# Altium PCB dianshe1dianluban.PcbDoc
Units mil, origin at the board's own origin, x right, y up, seen from the top; angles counter-clockwise.
Board outline 6000 x 4000 mil, 2 copper layers (Top Layer, Bottom Layer); 23 components, 15 nets, 71 pads, 0 vias.
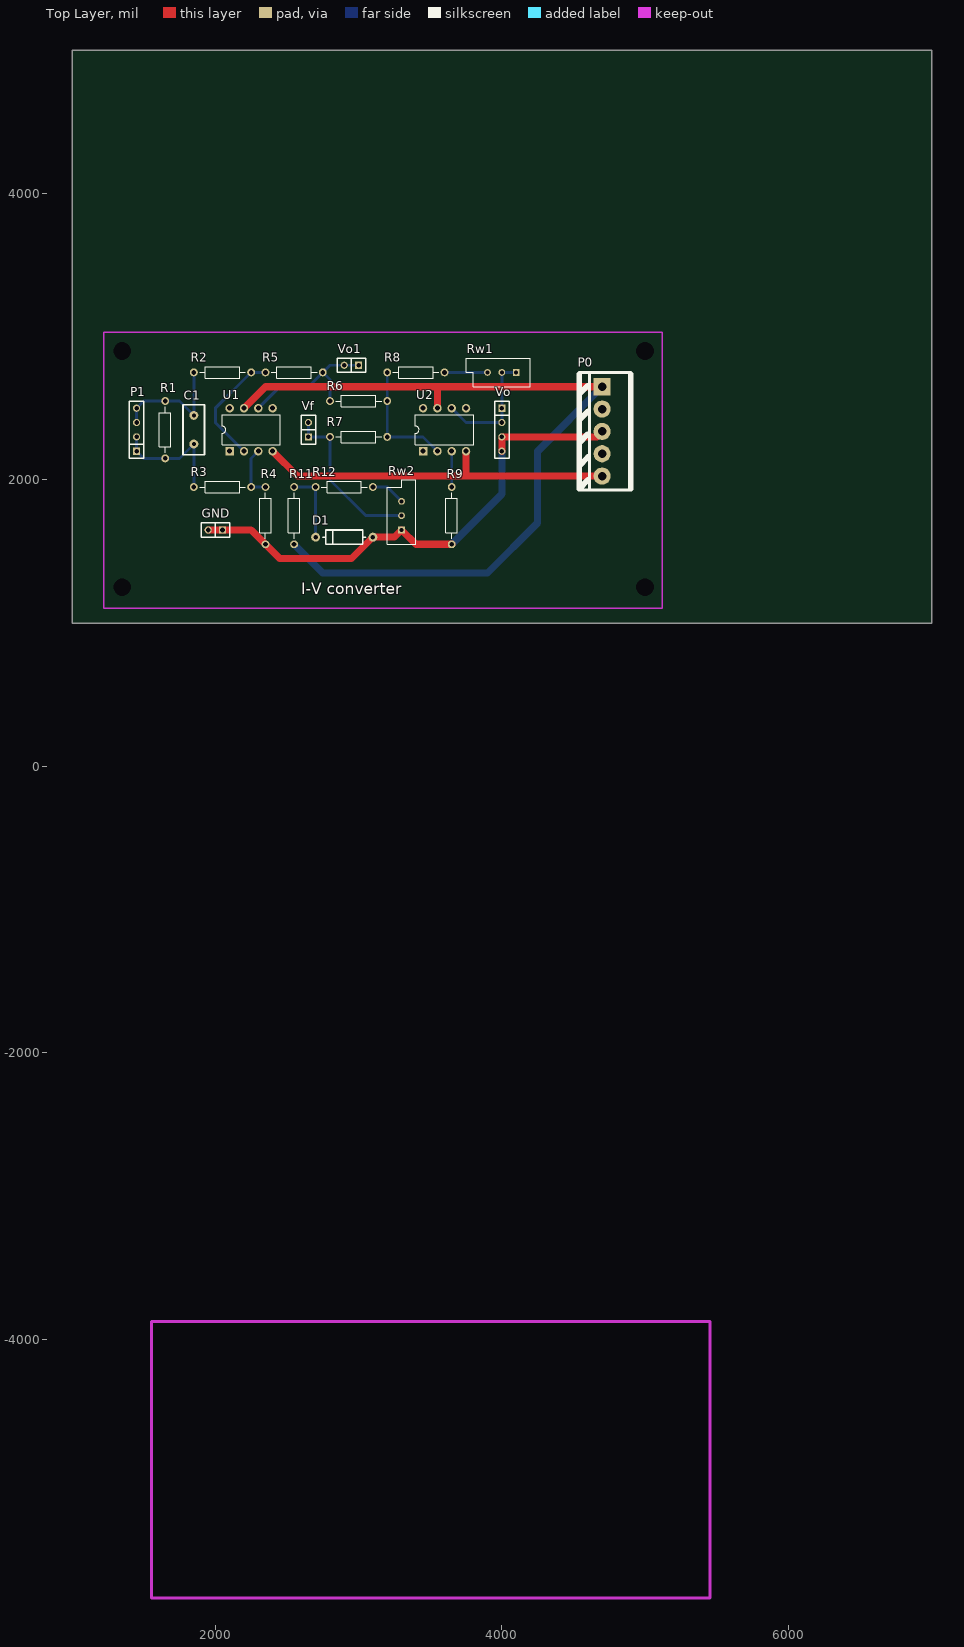
[diagram p0: Top Layer view]
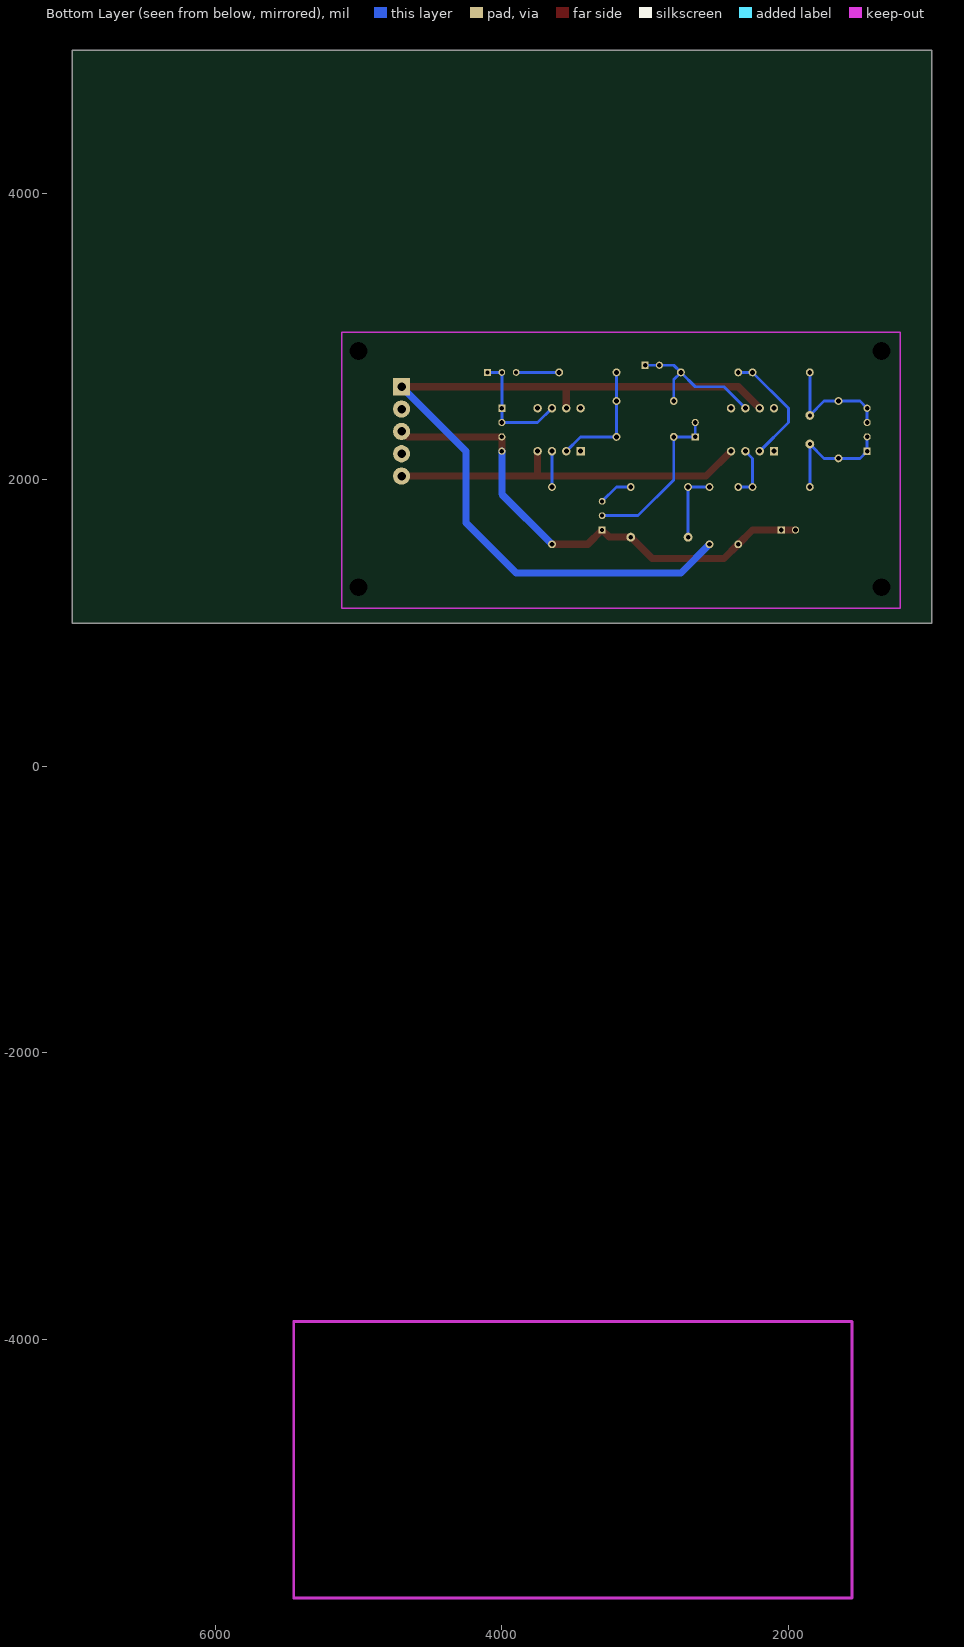
[diagram p1: Bottom Layer view, seen from below]

## Layer stack, top to bottom
Top Layer: signal copper 1.4
Dielectric: dielectric 12.6, FR-4, Dk 4.8
Bottom Layer: signal copper 1.4

## Board outline
1000,1000 7000,1000 7000,5000 1000,5000

## Design rules (kind name [scope] priority, off if disabled: settings)
Clearance [All] p1: gap=10
PolygonConnect [All] p1: connectstyle=Relief reliefconductorwidth=10 reliefentries=4 polygonreliefangle="90 Angle"
RoutingVias [All] p1: holewidth=28 width=50 viastyle="Through Hole" minholewidth=28 minwidth=50 maxholewidth=28 maxwidth=50
SilkscreenOverComponentPads [All] p1: minsilkscreentomaskgap=10
SolderMaskExpansion [All] p1: expansion=4
TestPointUsage [All] p1: valid=0 allowmultiple=FALSE
Testpoint [All] p1: side=15 testpointundercomponent=TRUE minsize=40 maxsize=100 preferedsize=60 minholesize=0 maxholesize=40 preferedholesize=32 testpointgrid=1 style=1023 order=0-112345678
Width [All] p1: maxlimit=50 minlimit=10 preferedwidth=20 minimp=50.000000 maximp=50.000000 favimp=50.000000
23 further rules are at their usual default settings.

## Components (designator, comment, footprint, x,y, rotation, side; value= is the part's Value field where it differs from the comment)
C1 "Cap" RAD0.2 1850,2250 r90 top
D1 "D Zener" DIODE0.4 3100,1600 r180 top
GND "Header 2" SIP2 2050,1650 r180 top
P0 "Header 5" "POWER PLUG5" 4700,2650 r90 top
P1 "Header 4" SIP4 1450,2200 r90 top
R1 "Res2" AXIAL-0.4 1650,2350 r90 top
R2 "Res2" AXIAL-0.4 2050,2750 r0 top
R3 "Res2" AXIAL-0.4 2050,1950 r0 top
R4 "Res2" AXIAL-0.4 2350,1750 r90 top
R5 "Res2" AXIAL-0.4 2550,2750 r0 top
R6 "Res2" AXIAL-0.4 3000,2550 r0 top
R7 "Res2" AXIAL-0.4 3000,2300 r0 top
R8 "Res2" AXIAL-0.4 3400,2750 r0 top
R9 "Res2" AXIAL-0.4 3650,1750 r90 top
R11 "Res2" AXIAL-0.4 2550,1750 r90 top
R12 "Res2" AXIAL-0.4 2900,1950 r0 top
Rw1 "RPot" VR5 4000,2750 r180 top
Rw2 "RPot" VR5 3300,1750 r90 top
U1 "OP-07" DIP-8 2250,2350 r0 top
U2 "OP-07" DIP-8 3600,2350 r0 top
Vf "Header 2" SIP2 2650,2300 r90 top
Vo "Header 4" SIP4 4000,2500 r270 top
Vo1 "Header 2" SIP2 3000,2800 r180 top

## Footprints (in the part's own frame and the unit in brackets; to place one, negate y for a bottom-side part, rotate by r counter-clockwise, add the part's x,y. Pads: shape width x height; smd on the part's side, far side on the other; paste and mask are expansions set on the pad)
AXIAL-0.4 [mm] "Resistor; 2 Leads"
  round 1.4 hole 0.85: 1(-5.08,0) 2(5.08,0)
  silkscreen extent -4.06,-1.02 4.06,1.02
DIODE0.4 [mil]
  round 62 hole 32: 1(0,0) 2(400,0)
  silkscreen extent 50,-50 350,50
DIP-8 [mm] "DIP; 8 Leads; Row Spacing 7.62 mm; Pitch 2.54 mm"
  rect 1.5x1.5 hole 0.9: 1(-3.81,-3.81)
  round 1.5 hole 0.9: 2(-1.27,-3.81) 3(1.27,-3.81) 4(3.81,-3.81) 5(3.81,3.81) 6(1.27,3.81) 7(-1.27,3.81) 8(-3.81,3.81)
  silkscreen extent -5.15,-2.65 5.15,2.65
"POWER PLUG5" [mil] "双电源插座"
  rect 120x120 hole 60: 1(0,0)
  round 120 hole 60: 2(-156,0) 3(-312,0) 4(-468,0) 5(-624,0)
  silkscreen extent -722,-200 100,160
RAD0.2 [mil]
  round 62 hole 28: 1(0,0) 2(200,0)
  silkscreen extent -75,-75 275,75
SIP2 [mil]
  rect 50x50 hole 32: 1(0,0)
  round 50 hole 32: 2(100,0)
  silkscreen extent -50,-50 150,50
SIP4 [mil]
  rect 50x50 hole 32: 1(0,0)
  round 50 hole 32: 2(100,0) 3(200,0) 4(300,0)
  silkscreen extent -50,-50 350,50
VR5 [mm] "Potentiometer; 3 Leads"
  rect 1.2x1.2 hole 0.7: 1(-2.54,0)
  round 1.2 hole 0.7: 2(0,0) 3(2.54,0)
  silkscreen extent -5.08,-2.54 6.35,2.54

## Part data
C1: "Capacitor"
D1: "Zener Diode"
GND Vf Vo1: "Header, 2-Pin"
P0: "Header, 5-Pin"
P1 Vo: "Header, 4-Pin"
R1 R2 R3 R4 R5 R6 R7 R8 R9 R11 R12: "Resistor"
Rw1 Rw2: "Potentiometer"

## Free pads (board coordinates)
  round 60 hole 125: 0(1350,2900) 1(5000,2900) 2(1350,1250) 3(5000,1250)

## Nets (pads, with @x,y where several pads share a name; then routed paths per layer and width w, separated by ;. In a path a pad name is that pad's centre, name@x,y a point inside that pad or via, vN(x,y) a via of type N, cw(c..) or ccw(c..) an arc to the next point about the centre after c; other vN are vias at no path point)
+12V: P0.1 R11.1 U1.7 U2.7 | length 5776.3
  Top Layer w50: U1.7 2350,2650 P0.1 ; U2.7 3550,2650
  Bottom Layer w50: R11.1 2750,1350 3900,1350 4250,1700 4250,2200 P0.1
-12V: P0.5 U1.4 U2.4 | length 2546.1
  Top Layer w50: U1.4 2574,2026 P0.5 ; 3750,2026 U2.4
GND: D1.1 GND.1 GND.2 P0.3 R4.1 R9.1 Rw2.1 Vo.3 Vo.4 | length 3517.8
  Top Layer w50: GND.2 GND.1 2250,1650 R4.1 2450,1450 2950,1450 D1.1 3250,1600 Rw2.1 3400,1550 R9.1 ; Vo.4 Vo.3 4662,2300 P0.3
  Bottom Layer w50: R9.1 4000,1900 Vo.4
NetC1_1: C1.1 P1.1 P1.2 R1.1 R3.1 | length 862.1
  Bottom Layer w20: P1.2 P1.1 1500,2150 R1.1 1750,2150 C1.1 R3.1
NetC1_2: C1.2 P1.3 P1.4 R1.2 R2.1 | length 862.1
  Bottom Layer w20: P1.3 P1.4 1500,2550 R1.2 1750,2550 C1.2 R2.1
NetD1_2: D1.2 R11.2 R12.1 | length 500
  Bottom Layer w20: R11.2 R12.1 D1.2
NetR2_2: R2.2 R5.1 U1.2 | length 836.4
  Bottom Layer w20: U1.2 2000,2400 2000,2500 R2.2 R5.1
NetR3_2: R3.2 R4.2 U1.3 | length 370.7
  Bottom Layer w20: U1.3 2250,2150 R3.2 R4.2
NetR5_2: R5.2 R6.1 U1.6 Vo1.1 Vo1.2 | length 1045
  Bottom Layer w20: U1.6 2450,2650 2650,2650 R5.2 ; R6.1 2800,2700 R5.2 ; Vo1.1 Vo1.2 2800,2800 R5.2
NetR6_2: R6.2 R7.2 R8.1 U2.2 | length 841.4
  Bottom Layer w20: R8.1 R6.2 R7.2 3450,2300 U2.2
NetR7_1: R7.1 Rw2.2 Vf.1 Vf.2 | length 1153.6
  Bottom Layer w20: Vf.2 Vf.1 R7.1 2800,2000 3050,1750 Rw2.2
NetR8_2: R8.2 Rw1.3 | length 300
  Bottom Layer w20: R8.2 Rw1.3
NetR9_2: R9.2 U2.3 | length 250
  Bottom Layer w20: R9.2 U2.3
NetR12_2: R12.2 Rw2.3 | length 241.4
  Bottom Layer w20: R12.2 3200,1950 Rw2.3
NetRw1_1: Rw1.1 Rw1.2 U2.6 Vo.1 Vo.2 | length 841.4
  Bottom Layer w20: U2.6 3750,2400 Vo.2 Vo.1 Rw1.2 Rw1.1
pads on no net: P0.2 P0.4 U1.1 U1.5 U1.8 U2.1 U2.5 U2.8

## Keep-outs
Keep-Out Layer:
  lines w10: 1220.47,1102.36 5118.11,1102.36 5118.11,3031.5 1220.47,3031.5 1220.47,1102.36
  lines w20: 1555,-3875.87 1555,-5805 5452.64,-5805 5452.64,-3875.87 1555,-3875.87 ; 1555,-3875.87 1555,-3875.87

## Silkscreen, mask and mechanical layers (free items; w line width, h text height)
Top Overlay:
  text "I-V converter" at 2600,1200 h80